# Altium PCB (Poly)TC364_MainBoard_PCB_V1.1.PcbDoc
Units mm, origin at the board's own origin, x right, y up, seen from the top; angles counter-clockwise.
Board outline 88.25 x 67.25 mm, 4 copper layers (TOP, POW02, GND03, BOT), stack 0.603 mm thick; 72 components, 69 nets, 280 pads, 35 vias.
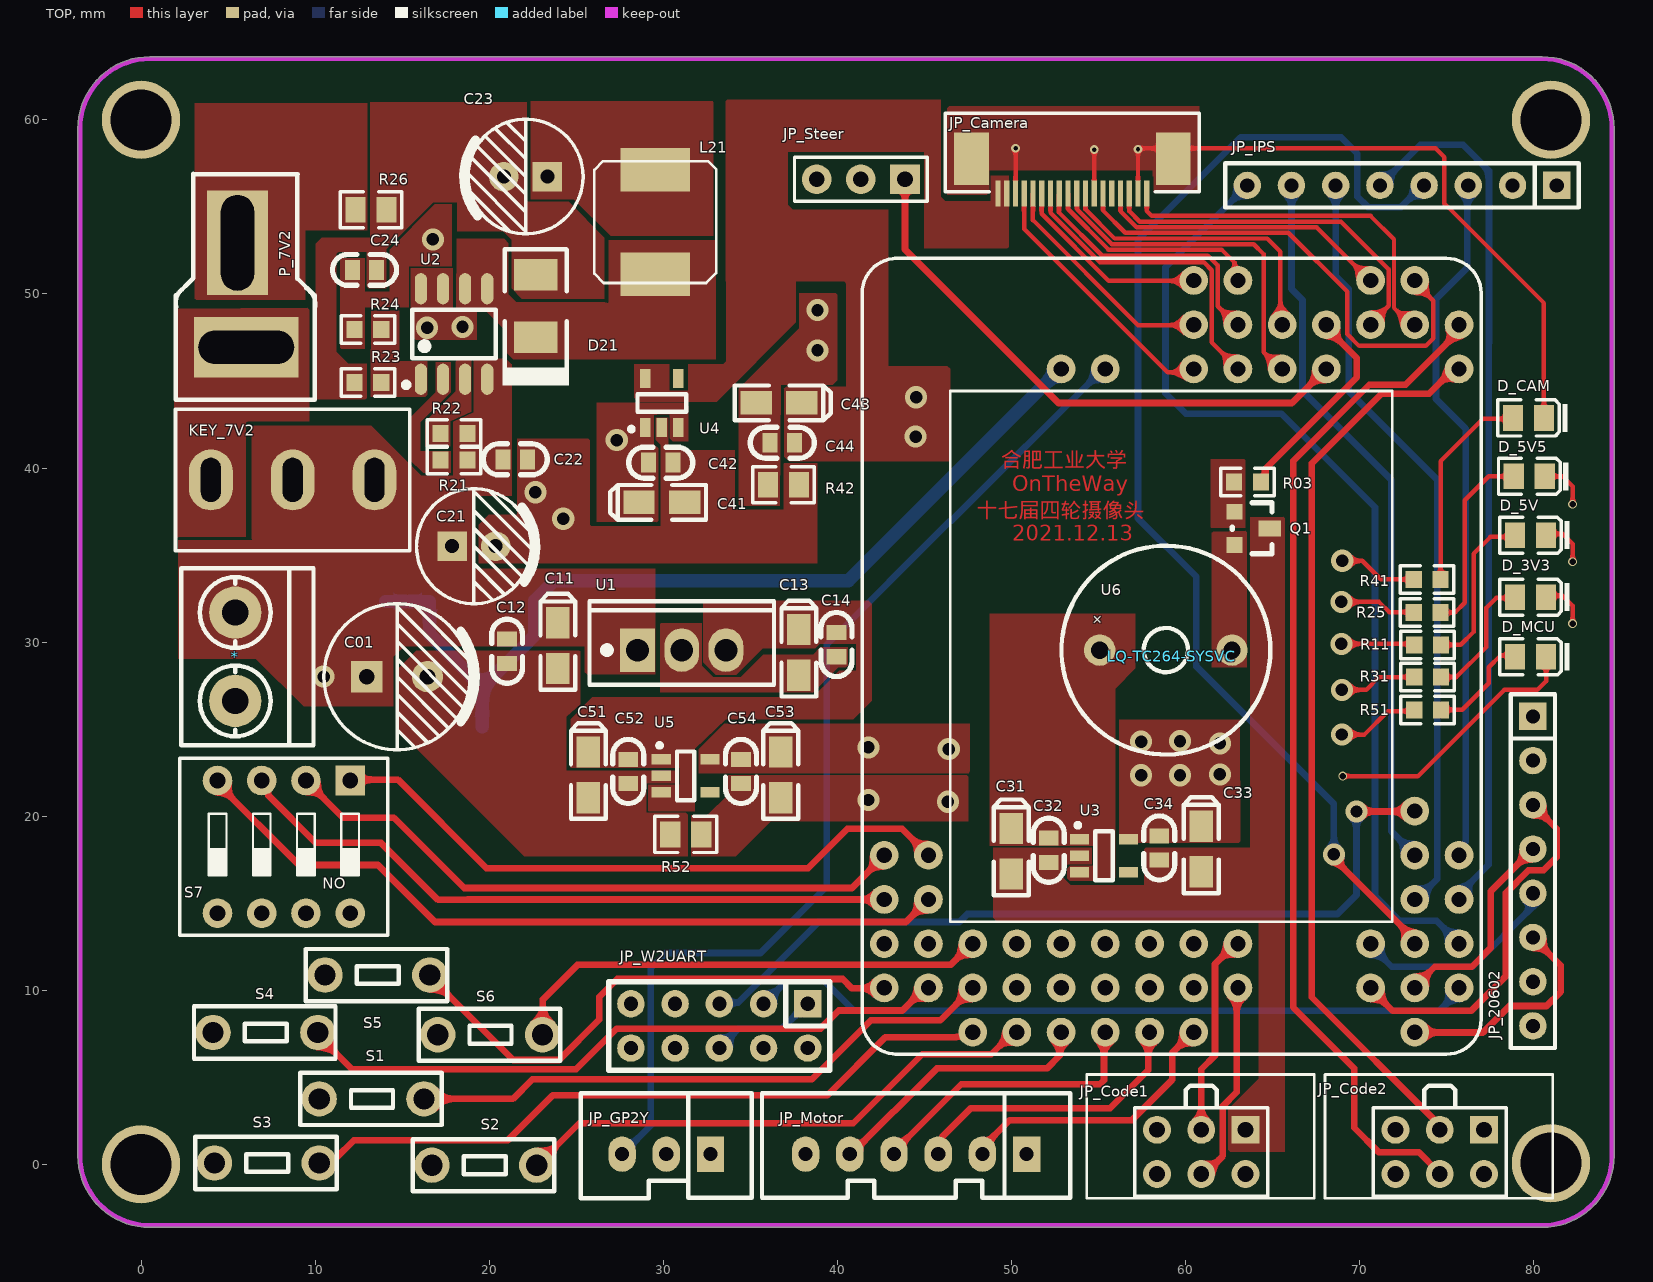
[diagram p0: TOP view]
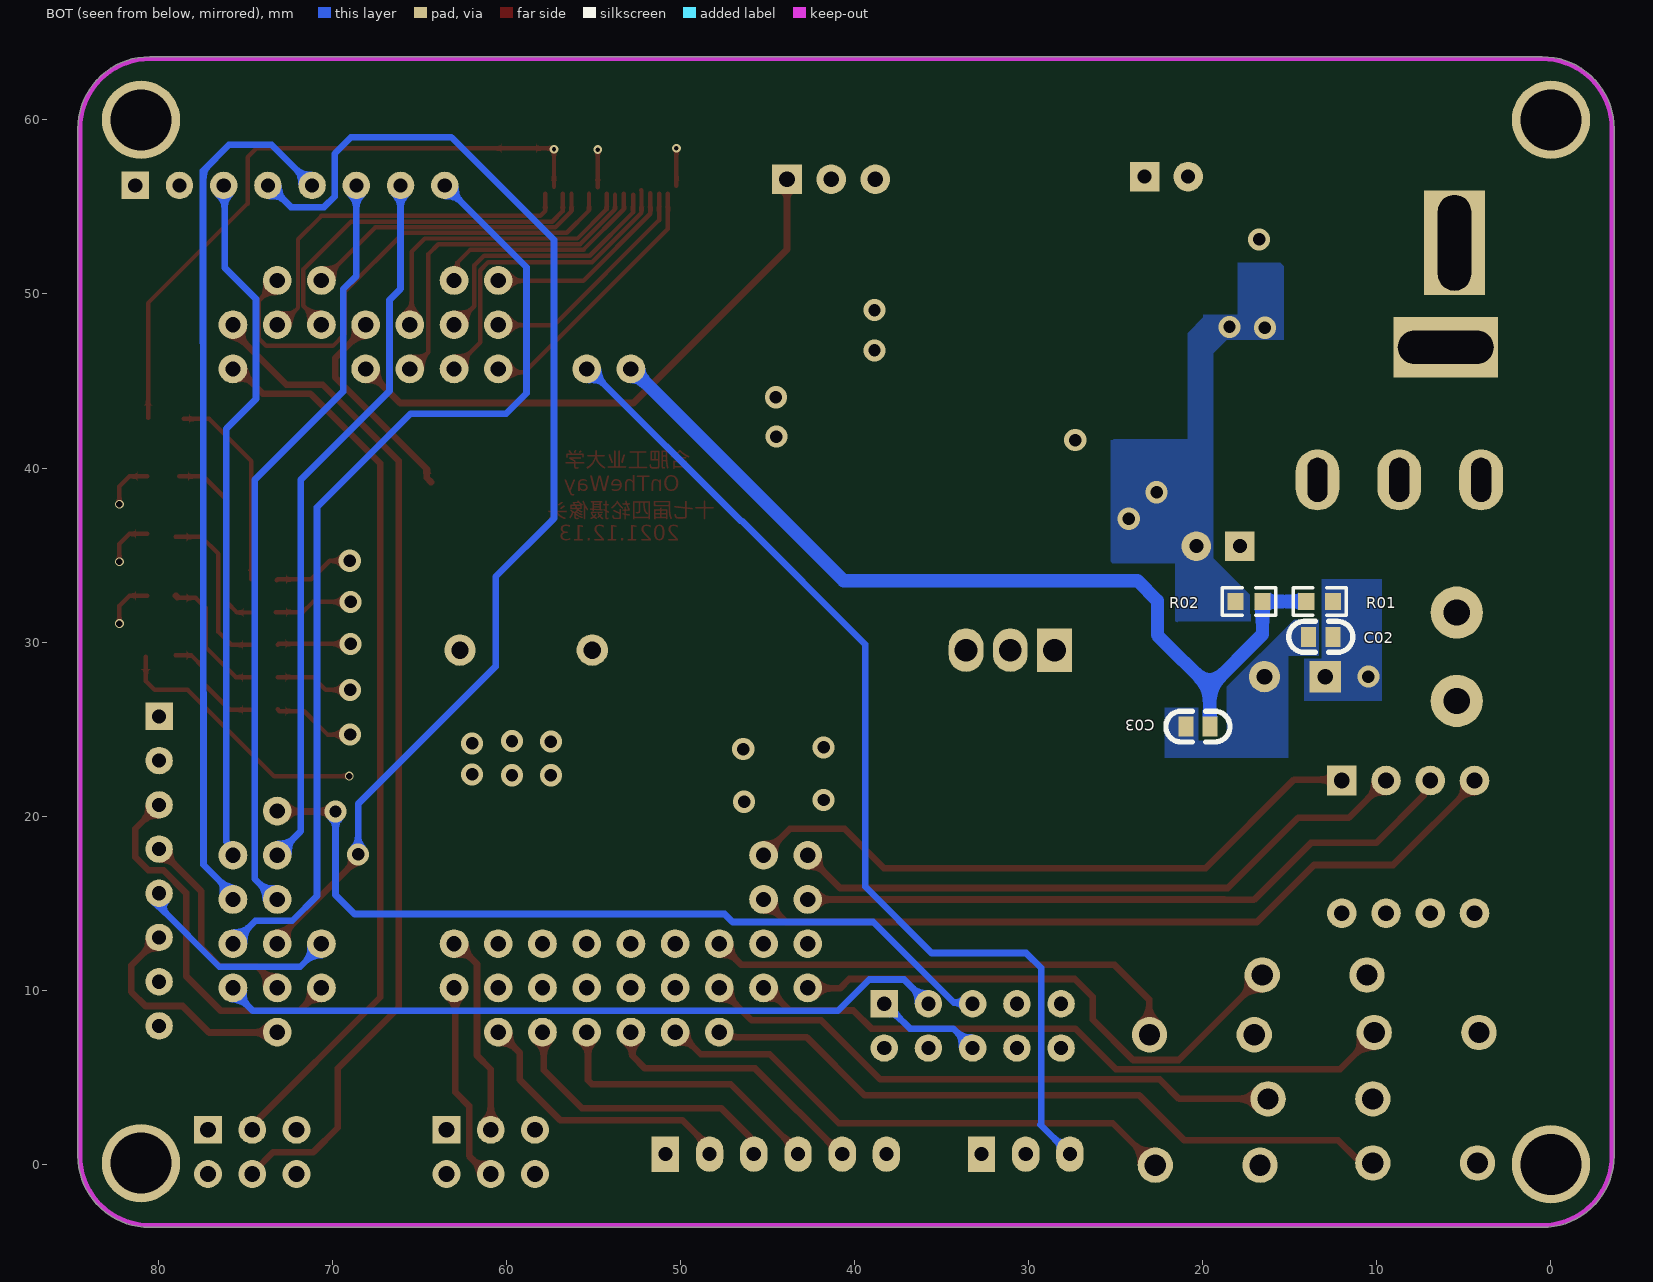
[diagram p1: BOT view, seen from below]
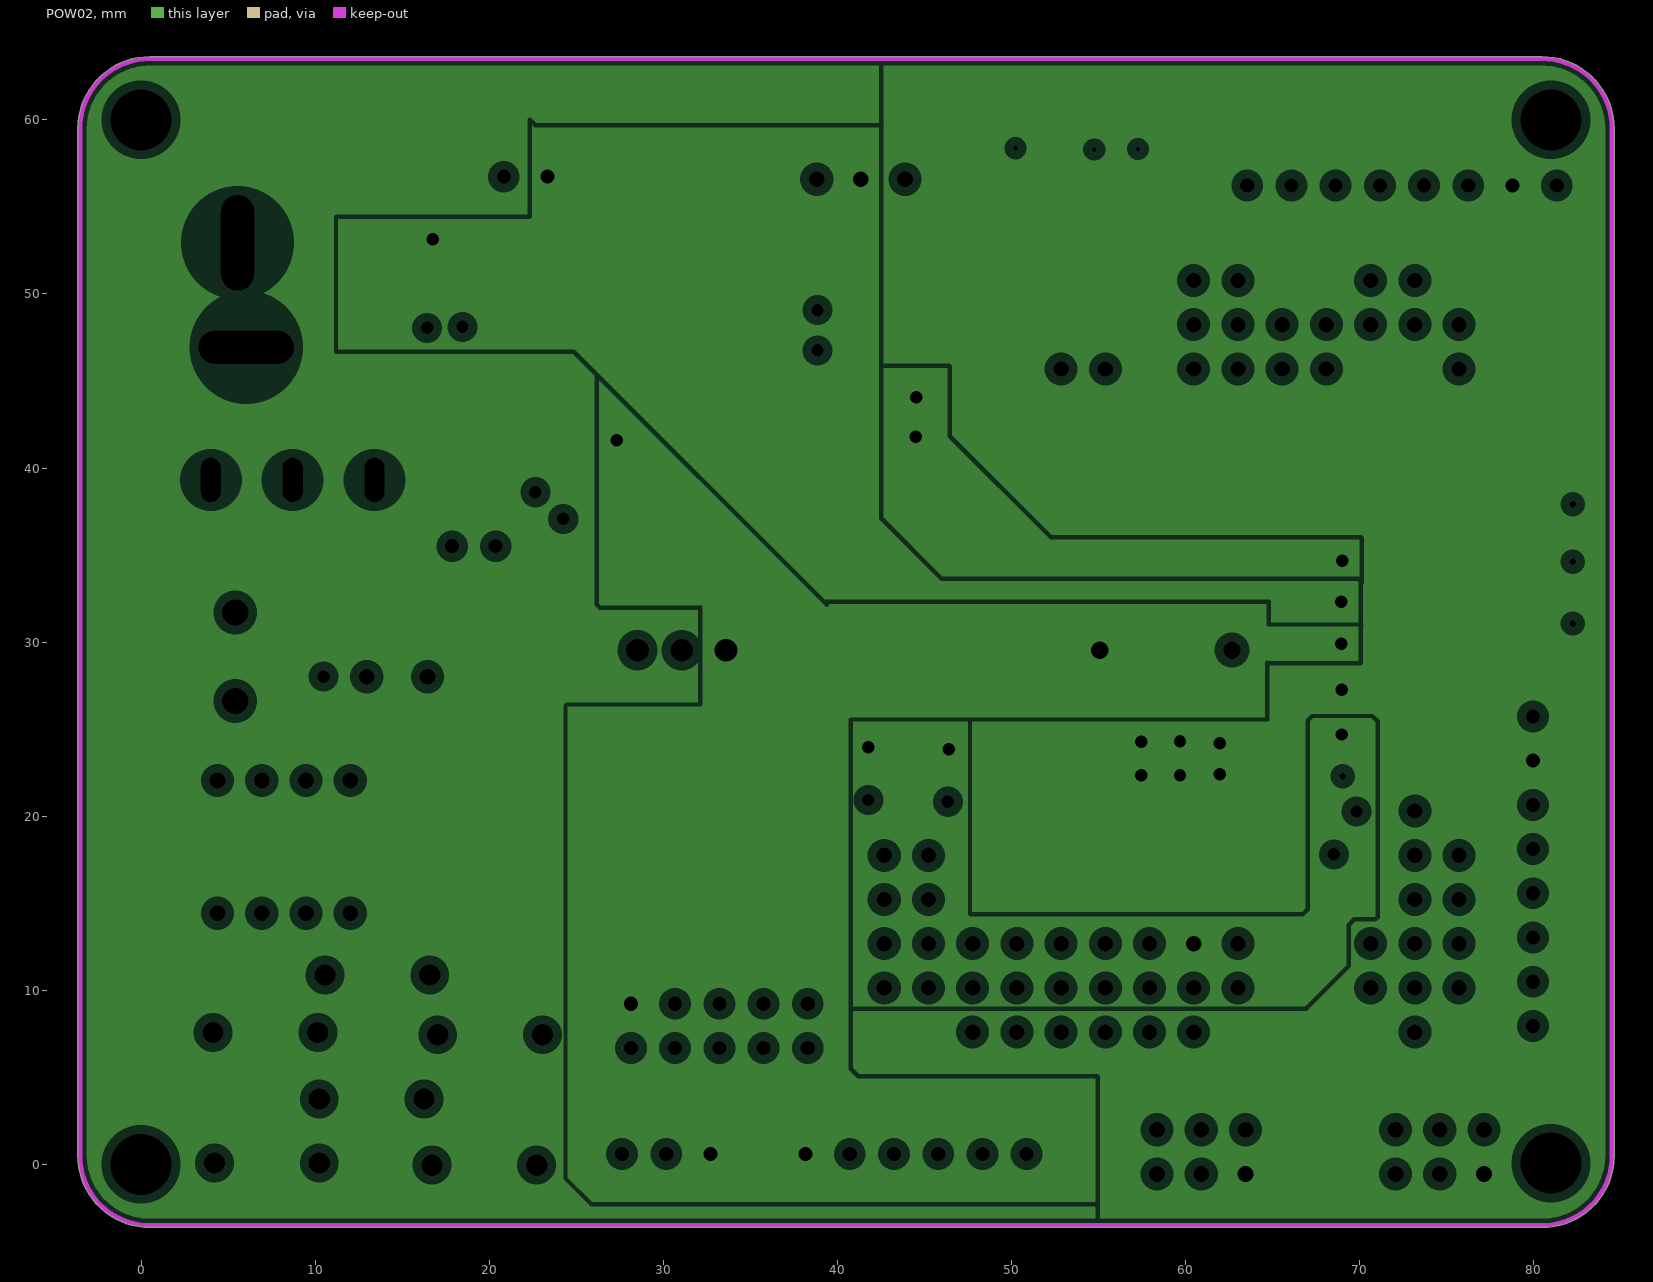
[diagram p2: POW02, clearances drawn from the general rule]
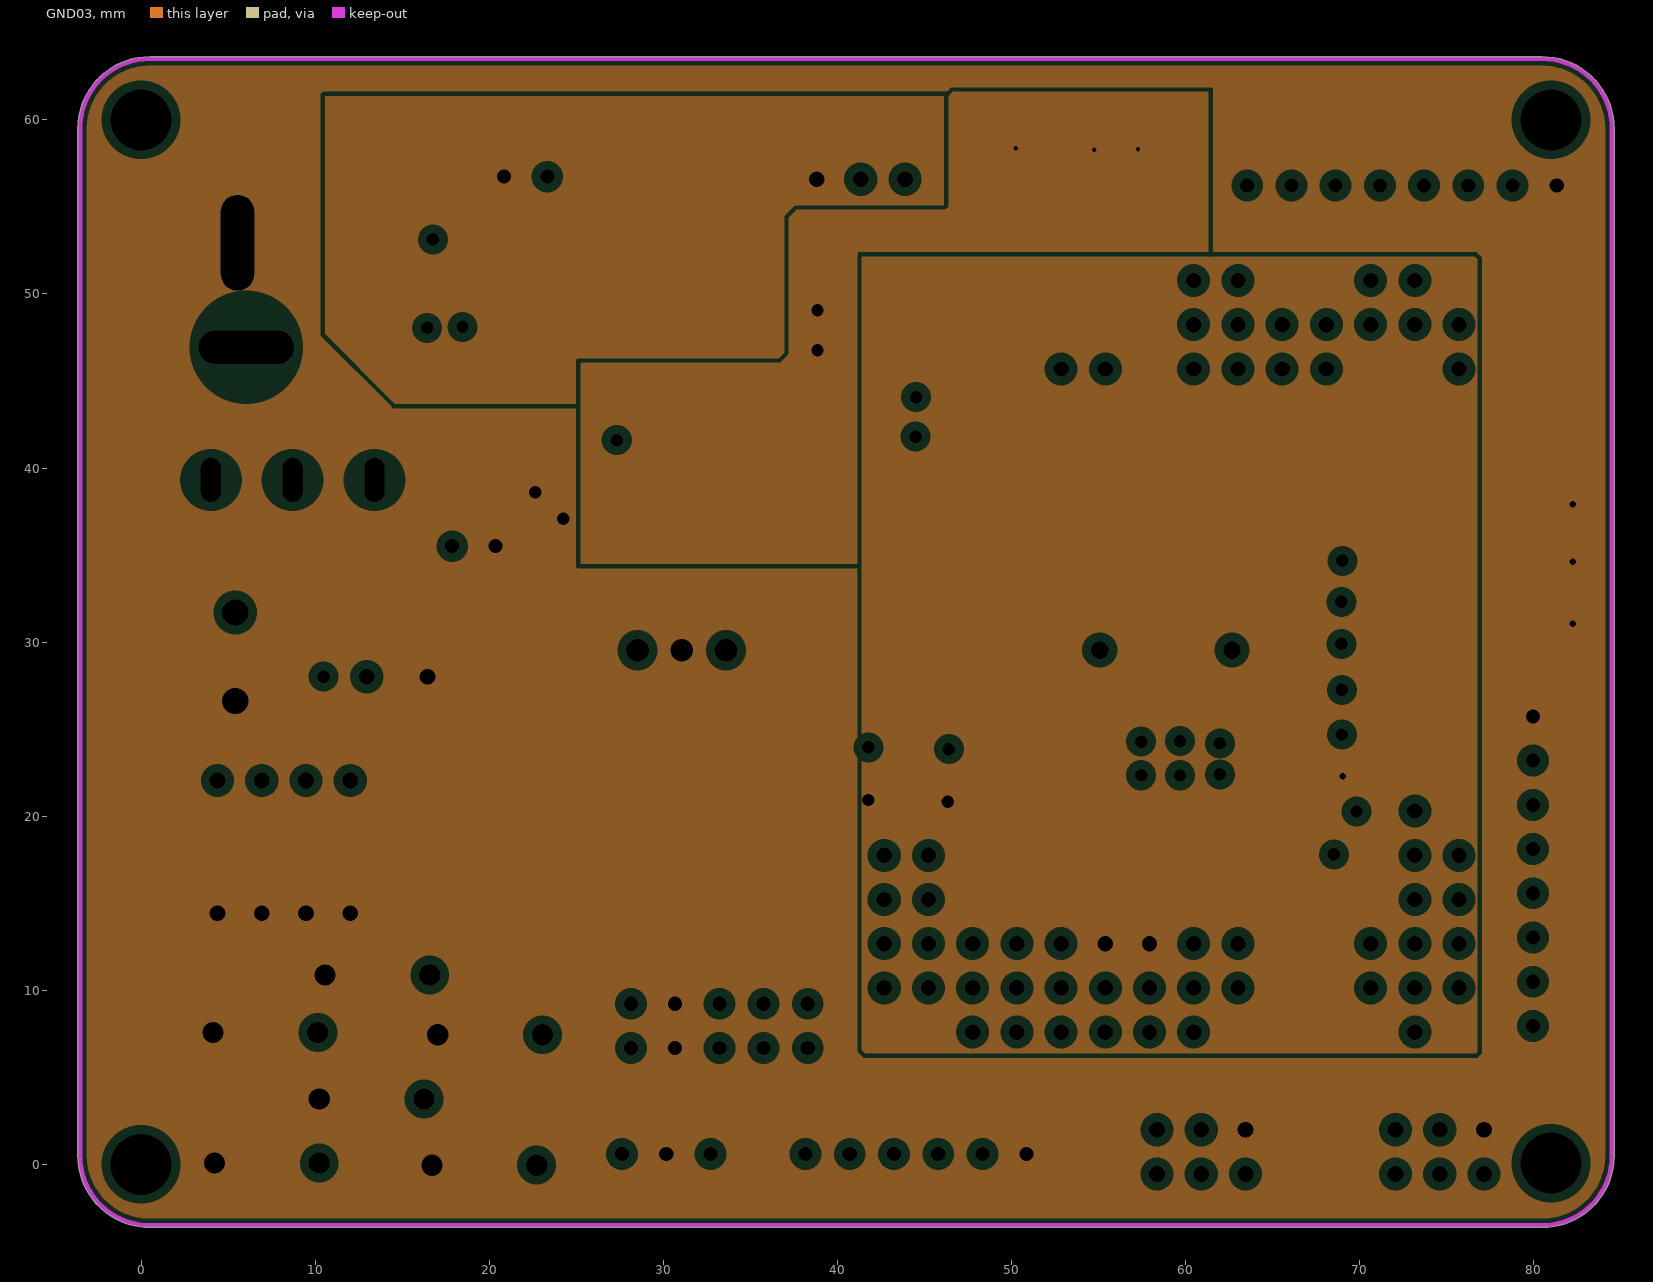
[diagram p3: GND03, clearances drawn from the general rule]

## Layer stack, top to bottom
Top Solder: solder mask 0.0102, Solder Resist, Dk 3.5
TOP: signal copper 0.0356
Dielectric 2: prepreg 0.0711, PP-006, Dk 4.1
POW02: plane copper 0.035, net VCC3V3
Dielectric 1: dielectric 0.32, FR-4, Dk 4.8
GND03: plane copper 0.035, net (Multiple Nets)
Dielectric 3: prepreg 0.0711, PP-006, Dk 4.1
BOT: signal copper 0.0356
Bottom Solder: solder mask 0.0102, Solder Resist, Dk 3.5

## Board outline
-3.627,0.5 -3.627,59.5 cw(c0.5,59.5) 0.5,63.627 80.5,63.627 cw(c80.5,59.5) 84.627,59.501 cw(c80.5,59.5) 84.627,59.5 ccw(c84.5,59.5) 84.627,59.501 84.627,59.5 84.627,0.5 cw(c84.5,0.5) 84.627,0.499 ccw(c80.5,0.5) 84.627,0.5 84.627,0.499 cw(c80.5,0.5) 80.5,-3.627 0.5,-3.627 cw(c0.5,0.5)

## Design rules (kind name [scope] priority, off if disabled: settings)
Clearance [All] p1: gap=0.051 ignorepadtopadclearanceinfootprint=FALSE
HoleSize [All] p1 off: absolutevalues=TRUE maxlimit=2.54 minlimit=0.025 maxpercent=80.000 minpercent=20.000
MinimumSolderMaskSliver [All] p1 off: minsoldermaskwidth=0.254
PlaneClearance [All] p1: clearance=0.508
PlaneConnect [All] p1: planeconnectstyle=Relief reliefexpansion=0.508 reliefentries=4 reliefconductorwidth=0.254 reliefairgap=0.254
PolygonConnect [All] p1: connectstyle=Direct reliefconductorwidth=0.254 reliefentries=4 polygonreliefangle="90 Angle" airgapwidth=0.254
RoutingVias [All] p1: holewidth=0.711 width=1.27 viastyle="Through Hole" minholewidth=0.711 minwidth=1.27 maxholewidth=0.711 maxwidth=1.27
SilkToSilkClearance [All] p1 off: silktosilkclearance=0.254
SilkToSolderMaskClearance [IsPad] p1 off: minsilkscreentomaskgap=0.254 clearancetoexposedcopper=TRUE
SolderMaskExpansion [All] p1: expansion=0.102
Width [All] p1: maxlimit=1.27 minlimit=0.254 preferedwidth=0.381
24 further rules are at their usual default settings.

## Classes and differential pairs
component class TC364_MainBoard_Core_V1.1: LQ-TC264-SYSVC
component class TC364_MainBoard_Singal_V1.0: C03 JP_20602 JP_Camera JP_Code1 JP_Code2 JP_GP2Y JP_IPS JP_Motor JP_Steer JP_W2UART Q1 R01 R02 R03 S1 S2 S3 S4 S5 S6 S7 U6
component class TC364_MainBoard_Power_V1.0: * C01 C02 C11 C12 C13 C14 C21 C22 C23 C24 C31 C32 C33 C34 C41 C42 C43 C44 C51 C52 C53 C54 D21 D_3V3 D_5V D_5V5 D_CAM D_MCU KEY_7V2 L21 P_7V2 R11 R21 R22 R23 R24 R25 R26 R31 R41 R42 R51 R52 U1 U2 U3 U4 U5

## Components (designator, comment, footprint, x,y, rotation, side; value= is the part's Value field where it differs from the comment)
* "KCF301" KF301-2P 5.41,29.159 r0 top
C01 "680uF/16V" "CAP 3.5*8*11.5 - GD" 27.607,31.716 r180 top
C02 "0.1uF" 0603C 12.522,30.302 r0 bottom
C03 "0.1uF" 0603C 19.583,25.146 r0 bottom
C11 "10uF/16V" CASE-A_3216 23.952,29.794 r90 top
C12 "0.1uF" 0603C 21.031,30.175 r270 top
C13 "10uF/16V" CASE-A_3216 37.795,29.413 r90 top
C14 "0.1uF" 0603C 39.954,30.556 r270 top
C21 "330uF/16V" "CAP 2.5*6.3*11.2 - BK" 19.126,35.509 r0 top
C22 "0.1uF" 0603C 20.8,40.5 r0 top
C23 "330uF/16V" "CAP 2.5*6.3*11.2 - BK" 22.093,56.744 r180 top
C24 "0.1uF" 0603C 12.141,51.384 r0 top
C31 "10uF/16V" CASE-A_3216 49.987,17.983 r90 top
C32 "0.1uF" 0603C 52.146,18.745 r270 top
C33 "10uF/16V" CASE-A_3216 60.909,18.11 r90 top
C34 "0.1uF" 0603C 58.496,18.872 r270 top
C41 "10uF/16V" CASE-A_3216 29.921,38.024 r180 top
C42 "0.1uF" 0603C 29.159,40.31 r0 top
C43 "10uF/16V" CASE-A_3216 36.652,43.739 r0 top
C44 "0.1uF" 0603C 37.541,41.453 r180 top
C51 "10uF/16V" CASE-A_3216 25.705,22.377 r90 top
C52 "0.1uF" 0603C 27.991,23.266 r270 top
C53 "10uF/16V" CASE-A_3216 36.754,22.377 r90 top
C54 "0.1uF" 0603C 34.468,23.266 r270 top
D21 "SS54" SMA 22.682,51.105 r270 top
D_3V3 "LED" 0805_LED_S1 79.832,32.588 r180 top
D_5V "LED" 0805_LED_S1 79.832,36.144 r180 top
D_5V5 "LED" 0805_LED_S1 79.756,39.522 r180 top
D_CAM "LED" 0805_LED_S1 79.705,42.875 r180 top
D_MCU "LED" 0805_LED_S1 79.832,29.159 r180 top
JP_20602 "HDR-1X7" SIP8 79.959,25.73 r270 top
JP_Camera "FPC05-18" Camera-Port 53.162,58.496 r0 top
JP_Code1 "Header3X2" HDR2.54-LI-2x3P 60.909,0.711 r180 top
JP_Code2 "Header3X2" HDR2.54-LI-2x3P 74.609,0.711 r180 top
JP_GP2Y "HDR-1X3" SIP3N 32.715,0.584 r180 top
JP_IPS "HDR-1X7" SIP8 81.331,56.236 r180 top
JP_Motor "HDR-1X6" SIP6N 50.876,0.584 r180 top
JP_Steer "HDR-1X3" HDR2.54-LI-3P 41.351,56.591 r180 top
JP_W2UART "HEADER 5X2" IDC10-JLC 38.303,9.22 r180 top
KEY_7V2 "SS-12F23" KEY_7V2 8.712,39.319 r0 top
L21 "33uH" "7*7 L" 29.54,51.13 r90 top
LQ-TC264-SYSVC "LQ-TC264-SYSVC" TC364 42.697,48.235 r0 top
P_7V2 "T_Type_Adapter" T_Type_Adapter 5.596,51.695 r270 top
Q1 "PNP8550" PNP8550-SO 62.814,37.49 r270 top
R01 "200K" 0603_R 13.284,32.334 r180 bottom
R02 "100K" 0603_R 17.348,32.334 r180 bottom
R03 "1K" 0603_R 63.568,39.192 r180 top
R11 "4.7K" 0603_R 73.914,29.845 r0 top
R21 "1K" 0603_R 17.983,40.462 r0 top
R22 "2.7K" 0603_R 17.983,41.986 r0 top
R23 "3.9K" 0603_R 13.03,44.907 r180 top
R24 "22K" 0603_R 13.03,47.955 r0 top
R25 "4.7K" 0603_R 73.889,31.699 r0 top
R26 "0" 0805_R 15.238,52.805 r0 top
R31 "4.7K" 0603_R 73.914,27.991 r0 top
R41 "4.7K" 0603_R 73.889,33.604 r0 top
R42 "0" 0805_R 34.874,41.074 r180 top
R51 "4.7K" 0603_R 73.914,26.111 r0 top
R52 "0" 0805_R 33.325,16.914 r0 top
S1 "SW-PB" KEY2-6X3 16.252,3.759 r180 top
S2 "SW-PB" KEY2-6X3 22.729,-0.051 r180 top
S3 "SW-PB" KEY2-6X3 10.236,0.076 r180 top
S4 "SW-PB" KEY2-6X3 10.156,7.569 r180 top
S5 "SW-PB" KEY2-6X3 16.586,10.871 r180 top
S6 "SW-PB" KEY2-6X3 23.063,7.442 r180 top
S7 "SW-4P" "CSW DIP-4P" 8.204,18.237 r180 top
U1 "SPX2940-5.0V" TO-220(TO-220-3) 31.064,29.54 r0 top
U2 "AS1015" SOP-8_150mil 17.983,47.701 r0 top
U3 "RT9013-3.3" SOT-23-5 55.321,17.729 r180 top
U4 "RT9013-3.3" SOT-23-5 29.921,43.739 r270 top
U5 "RT9013-3.3" SOT-23-5 31.29,22.316 r180 top
U6 "BEEP" BUZ 58.877,29.54 r0 top

## Footprints (in the part's own frame and the unit in brackets; to place one, negate y for a bottom-side part, rotate by r counter-clockwise, add the part's x,y. Pads: shape width x height; smd on the part's side, far side on the other; paste and mask are expansions set on the pad)
"7*7 L" [mm]
  rect 2.5x4 smd: 1(0,0) 2(6,0)
  silkscreen extent -0.5,-3.5 6.5,3.5
0603_R [mm]
  rect 0.93x0.98 smd: 1(-0.77,0) 2(0.77,0)
  silkscreen extent -1.53,-0.79 1.54,0.79, body extent -0.85,-0.4 0.85,0.4, height 0.56
0603C [mil]
  rect 34x45 smd: 1(0,0) 2(55,0)
  silkscreen extent -45,-35 100,35, body extent -3,-18 59,16, height 37
0805_LED_S1 [mm]
  rect 1.16x1.47 smd: A(0.89,0) K(-0.89,0)
  silkscreen extent -2.25,-1.04 1.77,1.03, body extent -1.01,-0.62 1.01,0.62, height 1.1
0805_R [mm]
  rect 1.16x1.47 smd: 1(-1.141,2.034) 2(-2.921,2.034)
  silkscreen extent -3.8,1 -0.26,3.07, body extent -3.03,1.41 -1.03,2.66, height 0.49
BUZ [mm]
  round 1.8 hole 1: 1(-3.8,0) 2(3.8,0)
  silkscreen extent -6,-6 6,6
Camera-Port [mil]
  rect 78.74x118.11 smd: 0(-214.92,-28.76) 0(241.68,-28.76)
  rect 12x59.06 smd: 1(181.68,-107.5) 2(161.88,-107.5) 3(142.08,-107.5) 4(122.28,-107.5) 5(102.48,-107.5) 6(82.68,-107.5) 7(62.88,-107.5) 8(43.08,-107.5) 9(23.28,-107.5) 10(3.48,-107.5) 11(-16.32,-107.5) 12(-36.12,-107.5) 13(-55.92,-107.5) 14(-75.72,-107.5) 15(-95.52,-107.5) 16(-115.32,-107.5) 17(-135.12,-107.5) 18(-154.92,-107.5)
  silkscreen extent -274,-103 301,75, body extent -271,-111 297,90, height 79
"CAP 2.5*6.3*11.2 - BK" [mm] "脚距2.5mm直径6.3mm高度11.2mm             淘宝ID:黄晶宝石"
  rect 1.7x1.7 hole 0.8: 1(-1.25,0)
  round 1.7 hole 0.8: 2(1.25,0)
  silkscreen extent -3.3,-3.3 3.56,3.3, body extent -3.15,-3.15 3.16,3.15, height 11.24
"CAP 3.5*8*11.5 - GD" [mm]
  rect 1.8x1.8 hole 0.9: 1(14.648,3.7)
  round 1.8 hole 0.9: 2(11.148,3.7)
  silkscreen extent 8.4,-0.5 17.1,7.9, body extent 8.89,-0.3 16.9,7.7, height 11.54
CASE-A_3216 [mm]
  rect 1.8x1.35 smd: 1(1.31,0) 2(-1.31,0)
  silkscreen extent -2.54,-1 2.97,1, body extent -1.7,-0.84 1.7,0.84, height 1.71
"CSW DIP-4P" [mm] "11.7*9.9*7mm"
  rect 1.7x1.7 hole 0.9: 1(-3.81,-3.81)
  round 1.7 hole 0.9: 2(-1.27,-3.81) 3(1.27,-3.81) 4(3.81,-3.81) 5(3.81,3.81) 6(1.27,3.81) 7(-1.27,3.81) 8(-3.81,3.81)
  silkscreen extent -5.97,-5.08 5.97,5.08, body extent -5.86,-4.95 5.86,4.95, height 6.65
HDR2.54-LI-2x3P [mm] "封装库来自淘宝卖家 ID：黄晶宝石"
  rect 1.6x1.6 hole 0.9: 1(-2.54,-1.27)
  round 1.6 hole 0.9: 2(-2.54,1.27) 3(0,-1.27) 4(0,1.27) 5(2.54,-1.27) 6(2.54,1.27)
  silkscreen extent -3.81,-2.54 3.81,2.54, body extent -3.81,-2.54 3.81,2.54, height 8.5
HDR2.54-LI-3P [mm] "排针，3脚"
  rect 1.7x1.7 hole 0.9: 1(-2.54,0)
  round 1.7 hole 0.9: 2(0,0) 3(2.54,0)
  silkscreen extent -3.81,-1.27 3.81,1.27, body extent -3.81,-1.27 3.81,1.27, height 8.5
IDC10-JLC [mil]
  rect 62x62 hole 32: 1(0,0)
  round 62 hole 32: 2(0,100) 3(100,0) 4(100,100) 5(200,0) 6(200,100) 7(300,0) 8(300,100) 9(400,0) 10(400,100)
  silkscreen extent -50,-50 450,150, body extent -53,-45 447,155, height 315
KEY2-6X3 [mil]
  round 80 hole 48: 1(0,0) 2(236.85,0)
  silkscreen extent -40,-59 280,59, body extent -37,-68 271,70, height 170
KEY_7V2 [mil]
  oval 99x138 hole 45 slot 100 at 90 deg: 1(-185.04,0) 2(0,0) 3(185.04,0)
  silkscreen extent -265,-160 265,160
KF301-2P [mm]
  round 3 hole 1.5: 1(0,-2.54) 2(0,2.54)
  silkscreen extent -3.1,-5.08 4.5,5.08
PNP8550-SO [mil]
  rect 36x36 smd: 1(0,0) 2(75,0)
  rect 36x50 smd: 3(38,80)
  silkscreen extent -20,-5 95,85, body extent -21,-8 97,90, height 42
SIP3N [mil]
  rect 62x80 hole 32: 1(0,0)
  oval 62x80 hole 32: 2(100,0) 3(200,0)
  silkscreen extent -93,-138 293,100, body extent -99,-128 297,96, height 277
SIP6N [mil]
  rect 62x80 hole 32: 1(0,0)
  oval 62x80 hole 32: 2(100,0) 3(200,0) 4(300,0) 5(400,0) 6(500,0)
  silkscreen extent -98,-138 598,98, body extent -99,-129 597,95, height 277
SIP8 [mil]
  rect 62x62 hole 32: 1(0,0)
  round 62 hole 32: 2(100,0) 3(200,0) 4(300,0) 5(400,0) 6(500,0) 7(600,0) 8(700,0)
  silkscreen extent -50,-50 750,50, body extent -50,-50 750,50, height 335
SMA [mm]
  rect 1.8x2.5 smd: 1(0,0) 2(3.6,0)
  silkscreen extent -1.47,-1.9 6.35,1.91
SOP-8_150mil [mm]
  oval 0.7x1.8 smd: 1(-1.905,-2.6) 2(-0.635,-2.6) 3(0.635,-2.6) 4(1.905,-2.6) 5(1.905,2.6) 6(0.635,2.6) 7(-0.635,2.6) 8(-1.905,2.6)
  silkscreen extent -2.9,-3.07 2.4,1.4, body extent -2.5,-3.1 2.5,3.1, height 1.75
SOT-23-5 [mm]
  rect 1.1x0.6 smd: 1(1.4,-0.95) 2(1.4,0) 3(1.4,0.95) 4(-1.4,0.95) 5(-1.4,-0.95)
  silkscreen extent -0.5,-1.87 1.62,1.4
T_Type_Adapter [mm]
  rect 6x3.5 hole 1.905 slot 5.49 at 0 deg: 1(-1.245,-0.051)
  rect 3.5x6 hole 1.905 slot 5.49 at 90 deg: 2(4.755,0.449)
  silkscreen extent -5.21,-3.61 7.77,4.42
TC364 [mm]
  round 1.65 hole 0.88: 21(0,-30.48) 22(2.54,-30.48) 23(0,-33.02) 24(2.54,-33.02) 25(0,-35.56) 26(2.54,-35.56) 27(0,-38.1) 28(2.54,-38.1) 30(5.08,-38.1) 31(5.08,-35.56) 33(7.62,-38.1) 34(7.62,-35.56) 36(10.16,-38.1) 37(10.16,-35.56) 39(12.7,-38.1) 40(12.7,-35.56) 42(15.24,-38.1) 43(15.24,-35.56) 45(17.78,-38.1) 46(17.78,-35.56) 48(20.32,-38.1) 49(20.32,-35.56) 57(27.94,-38.1) 58(27.94,-35.56) 60(30.48,-38.1) 61(30.48,-35.56) 62(33.02,-38.1) 63(33.02,-35.56) 64(33.02,-33.02) 65(30.48,-33.02) 66(33.02,-30.48) 67(30.48,-30.48) 69(30.48,-27.94) 88(33.02,-2.54) 89(33.02,0) 91(30.48,0) 94(27.94,0) 96(25.4,-2.54) 97(25.4,0) 99(22.86,-2.54) 100(22.86,0) 102(20.32,-2.54) 103(20.32,0) 105(17.78,-2.54) 106(17.78,0) 111(12.7,-2.54) 114(10.16,-2.54)
  round 1.65 hole 0.88 mask+0.102: 29(5.08,-40.64) 32(7.62,-40.64) 35(10.16,-40.64) 38(12.7,-40.64) 41(15.24,-40.64) 44(17.78,-40.64) 59(30.48,-40.64) 92(30.48,2.54) 95(27.94,2.54) 104(20.32,2.54) 107(17.78,2.54)
  silkscreen extent -1.27,-41.91 34.29,3.81
TO-220(TO-220-3) [mm]
  rect 2x2.5 hole 1.3: 1(-2.54,0)
  oval 2x2.5 hole 1.3: 2(0,0) 3(2.54,0)
  silkscreen extent -5.3,-2 5.3,2.8, body extent -5.08,-1.45 5.08,2.9, height 19.6

## Part data
C01 C11 C13 C21 C23 C31 C33 C41 C43 C51 C53: library part "Cap Pol1", "Polarized Capacitor (Radial)", LatestRevisionDate=17-Jul-2002, LatestRevisionNote="Re-released for DXP Platform.", PackageDescription="Polarized Capacitor (Radial); 2 Leads", PackageReference=RB7.6-15, Published=8-Jun-2000, Publisher="Altium Limited"
C02 C03 C12 C14 C22 C24 C32 C34 C42 C44 C52 C54: library part CAP, "Capacitor"
D21: library part SS34, "肖特基二极管", 属性=40V
D_3V3 D_5V D_5V5 D_CAM D_MCU: "发光二极管"
JP_20602 JP_IPS: library part "HEADER 8", "8 Pin Header"
JP_Code1 JP_Code2: library part "Header 3X2", "3*2P接插件"
JP_GP2Y JP_Steer: library part "Header 3", "3P接插件", BOM名称=3, 学习资源=https://shop463601444.t
JP_Motor: library part "HEADER 6"
KEY_7V2: library part SSW-1P, "1路波动开关", 学习资源=www.o
L21: library part L-CDRH, "功率屏蔽电感", 联系售后=https://shop463601444.t
Q1: library part PNP, "PNP Transistor"
R01 R02 R03 R11 R25 R26 R31 R41 R42 R51 R52: library part RES
R21 R22 R23 R24: library part RES, "贴片电阻", 学习资源=www.o
S1 S2 S3 S4 S5 S6: "按键"
S7: "4路编码开关", BOM名称=4, 学习资源=https://shop463601444.t, 淘宝ID=封
U1: library part LM2940, "5V稳压芯片", BOM名称=5V, 联系售后=www.o
U2: "可调升压芯片"
U6: library part BELL, "Bell"

## Free pads (board coordinates)
  round 4.5 hole 3.5: 2(0,0) 2(0,60) 2(81,0.068) 2(81,60)

## Via types
v1: diameter 1.27, hole 0.711, TOP to BOT, 28 vias
v2: diameter 0.508, hole 0.381, TOP to BOT, 4 vias
v3: diameter 0.508, hole 0.254, TOP to BOT, 3 vias

## Nets (pads, with @x,y where several pads share a name; then routed paths per layer and width w, separated by ;. In a path a pad name is that pad's centre, name@x,y a point inside that pad or via, vN(x,y) a via of type N, cw(c..) or ccw(c..) an arc to the next point about the centre after c; other vN are vias at no path point)
AN44: C03.1 LQ-TC264-SYSVC.114 R01.1 R02.2 | length 52.9
  BOT w0.762: R01.1 R02.2 16.578,30.437 19.609,27.407 ; C03.1@19.609,25.121 19.609,27.407 ; LQ-TC264-SYSVC.114@52.781,45.669 40.64,33.528 23.749,33.528 22.606,32.385 22.606,30.404 19.609,27.407
AN47: JP_GP2Y.3 LQ-TC264-SYSVC.111 | length 59.8
  BOT w0.381: JP_GP2Y.3 29.324,2.273 ; 29.286,2.311 29.286,11.278 30.15,12.141 35.585,12.141 39.395,15.951 39.395,29.87 46.507,36.982 46.558,36.982 55.169,45.593 LQ-TC264-SYSVC.111@55.372,45.593
GND: *.1 C01.2 C02.2 C03.2 C11.2 C12.2 C13.2 C14.2 C21.2 C22.2 C31.2 C32.2 C33.2 C34.2 C41.2 C42.2 C51.2 C52.2 D_3V3.K D_5V5.K D_5V.K JP_20602.1 JP_Code1.1 JP_Code2.1 JP_GP2Y.2 JP_IPS.1 JP_Motor.1 JP_W2UART.7 JP_W2UART.8 P_7V2.1 Q1.3 R02.1 R26.2 R42.2 R52.2 S1.2 S2.2 S3.2 S4.2 S5.2 S6.2 S7.5 S7.6 S7.7 S7.8 U1.2 U2.7 U2.8 U3.2 U4.2 U5.2 | length 8.6
  TOP w0.254: D_3V3.K@80.646,32.664 81.661,32.664 82.245,32.08 v2(82.245,31.064) ; D_5V.K@80.646,36.22 81.661,36.22 82.245,35.636 v2(82.245,34.62) ; D_5V5.K 81.661,39.522 82.245,38.938 v2(82.245,37.922)
  other v1: 24.257,37.084 22.657,38.608 16.434,48.057 18.466,48.108
GNDCAM: C43.2 C44.2 D_CAM.K JP_Camera.0 JP_Camera.2 JP_Camera.7 JP_Camera.16 R42.1 | length 41.7
  TOP w0.254: JP_Camera.16@50.241,56.21 v3(50.241,58.369) ; JP_Camera.7@54.762,56.134 v3(54.762,58.293) ; v3@57.226,58.369 57.228,58.367 57.505,58.367 57.507,58.369 74.371,58.369 74.879,57.861 74.879,55.194 80.595,49.478 D_CAM.K ; JP_Camera.2@57.277,56.159 v3(57.277,58.318)
  other v1: 38.862,46.761 38.862,49.073
GNDMCU: C53.2 C54.2 D_MCU.K LQ-TC264-SYSVC.40 LQ-TC264-SYSVC.43 R52.1 | length 15.3
  TOP w0.254: v2(69.037,22.301) 73.355,22.301 78.308,27.254 80.213,27.254 80.722,27.763 D_MCU.K
  other v1: 46.355,20.828 41.783,20.93
GNDSteer: C23.2 C24.2 D21.1 JP_Steer.3 R23.2 R26.1
NetD21_2: D21.2 L21.1 U2.5 U2.6
NetD_3V3_A: D_3V3.A R31.2 | length 7.6
  TOP w0.254: R31.2 75.565,27.991 77.292,29.718 77.292,31.979 77.851,32.537 78.867,32.537 D_3V3.A@78.918,32.588
  TOP w0.381: D_3V3.A@78.918,32.588 D_3V3.A@78.994,32.664
NetD_5V5_A: D_5V5.A R25.2 | length 10.8
  TOP w0.254: R25.2 75.489,31.699 76.048,32.258 76.048,38.151 77.419,39.522 D_5V5.A@78.816,39.522
NetD_5V_A: D_5V.A R11.2 | length 9.5
  TOP w0.254: R11.2 75.819,29.845 76.556,30.582 76.556,35.077 77.521,36.043 D_5V.A@79.019,36.043
NetD_CAM_A: D_CAM.A R41.2 | length 11.7
  TOP w0.254: R41.2 74.659,40.394 77.089,42.824 D_CAM.A@78.537,42.824
NetD_MCU_A: D_MCU.A R51.2 | length 6.2
  TOP w0.254: R51.2 75.895,26.111 77.419,27.635 77.419,28.55 78.105,29.235 D_MCU.A@79.019,29.235
NetKEY_7V2_1: KEY_7V2.1 P_7V2.2
NetQ1_1: Q1.1 R03.2
NetQ1_2: Q1.2 U6.2
NetR21_1: R21.1 U2.2
NetR22_1: R22.1 U2.3
NetR23_1: R23.1 R24.2 U2.1
P00.0: JP_Camera.8 LQ-TC264-SYSVC.100 | length 17.4
  TOP w0.254: JP_Camera.8 54.256,54.862 55.931,53.188 64.694,53.188 65.456,52.426 LQ-TC264-SYSVC.100@65.456,48.184
P00.1: JP_Camera.9 LQ-TC264-SYSVC.99 | length 19.7
  TOP w0.254: JP_Camera.9@53.772,55.702 53.772,54.864 55.778,52.857 63.932,52.857 64.491,52.299 64.491,46.66 LQ-TC264-SYSVC.99@65.481,45.669
P00.2: JP_Camera.10 LQ-TC264-SYSVC.104 | length 12.8
  TOP w0.254: JP_Camera.10@53.264,55.753 53.264,54.864 55.575,52.553 62.078,52.553 62.824,51.806 62.824,50.867 LQ-TC264-SYSVC.104@62.941,50.749
P00.3: JP_Camera.11 LQ-TC264-SYSVC.103 | length 15.3
  TOP w0.254: JP_Camera.11@52.73,55.702 52.73,54.686 55.22,52.197 61.29,52.197 61.849,51.638 61.849,49.301 LQ-TC264-SYSVC.103@62.941,48.209
P00.4: JP_Camera.12 LQ-TC264-SYSVC.102 | length 18.2
  TOP w0.254: JP_Camera.12@52.273,55.956 52.248,55.931 52.248,54.661 55.093,51.816 61.062,51.816 61.519,51.359 61.519,47.219 62.941,45.796 LQ-TC264-SYSVC.102@62.941,45.669
P00.5: JP_Camera.13 LQ-TC264-SYSVC.107 | length 11.4
  TOP w0.254: JP_Camera.13@51.74,55.778 51.74,54.61 55.601,50.749 LQ-TC264-SYSVC.107@60.401,50.749
P00.6: JP_Camera.14 LQ-TC264-SYSVC.106 | length 13.3
  TOP w0.254: JP_Camera.14 51.239,54.247 57.277,48.209 60.401,48.209 LQ-TC264-SYSVC.106@60.503,48.209
P00.7: JP_Camera.15 LQ-TC264-SYSVC.105 | length 15.2
  TOP w0.254: JP_Camera.15 50.736,53.734 58.979,45.491 60.223,45.491 LQ-TC264-SYSVC.105@60.427,45.695
P02.0: JP_Camera.6 LQ-TC264-SYSVC.92 | length 28.6
  TOP w0.254: JP_Camera.6 55.262,54.796 56.54,53.518 65.913,53.518 69.291,50.14 69.291,47.701 69.977,47.015 73.812,47.015 74.244,47.447 74.244,49.606 LQ-TC264-SYSVC.92@73.101,50.749
P02.1: JP_Camera.1 LQ-TC264-SYSVC.91 | length 21.3
  TOP w0.254: JP_Camera.1 57.777,54.771 58.064,54.483 70.637,54.483 71.984,53.137 71.984,49.2 72.974,48.209 LQ-TC264-SYSVC.91@73.101,48.209
P02.2: JP_Camera.4 LQ-TC264-SYSVC.95 | length 17
  TOP w0.254: JP_Camera.4 56.268,54.755 57.201,53.823 67.539,53.823 70.561,50.8 LQ-TC264-SYSVC.95@70.561,50.749
P02.3: JP_Camera.3 LQ-TC264-SYSVC.94 | length 21
  TOP w0.254: JP_Camera.3 56.771,54.76 57.379,54.153 68.936,54.153 71.679,51.41 71.679,49.327 LQ-TC264-SYSVC.94@70.561,48.209
P02.6: LQ-TC264-SYSVC.97 R03.1 | length 11.8
  TOP w0.381: R03.1 64.585,39.439 64.585,39.947 69.85,45.212 69.85,46.304 LQ-TC264-SYSVC.97@68.174,47.981
P02.7: JP_Steer.1 LQ-TC264-SYSVC.96 | length 32.5
  TOP w0.381: JP_Steer.1@43.917,56.388 43.891,56.363 43.891,52.553 52.705,43.739 66.116,43.739 68.072,45.695 LQ-TC264-SYSVC.96
P10.1: JP_Code2.4 LQ-TC264-SYSVC.89 | length 58.5
  TOP w0.381: JP_Code2.4@74.5,-0.4 73.4,0.7 71.1,0.7 69.7,2.1 69.7,5.509 66.192,9.017 66.192,40.411 70.561,44.78 72.644,44.78 75.641,47.777 LQ-TC264-SYSVC.89@75.641,48.209
P10.2: JP_W2UART.1 JP_W2UART.6 | length 6.2
  BOT w0.381: JP_W2UART.6 34.341,7.798 36.83,7.798 37.655,8.623 37.706,8.623 JP_W2UART.1 JP_W2UART.1@38.303,9.271
P10.3: JP_Code2.3 LQ-TC264-SYSVC.88 | length 51.4
  TOP w0.381: JP_Code2.3@74.6,2.1 74.6,2.26 67.259,9.601 67.259,40.259 71.272,44.272 73.99,44.272 LQ-TC264-SYSVC.88@75.26,45.542
P15.0: JP_IPS.6 LQ-TC264-SYSVC.65 | length 44.4
  BOT w0.381: JP_IPS.6@68.529,56.591 68.631,56.49 JP_IPS.6 68.631,51.029 69.393,50.267 69.393,44.399 74.473,39.319 74.473,16.408 73.304,15.24 LQ-TC264-SYSVC.65@73.203,15.24
P15.1: JP_IPS.5 LQ-TC264-SYSVC.64 | length 90.4
  BOT w0.381: JP_IPS.5@71.069,56.591 71.526,56.591 73.508,58.572 75.946,58.572 77.419,57.099 ; LQ-TC264-SYSVC.64@75.59,15.113 75.59,15.392 77.394,17.196 ; 77.394,17.196 77.419,37.134 ; 77.394,17.196 77.419,17.221 77.419,37.134 ; 77.419,37.134 77.419,57.099 ; 77.419,37.134 77.445,57.074 77.419,57.099
P15.2: JP_IPS.7 LQ-TC264-SYSVC.67 | length 41.7
  BOT w0.381: JP_IPS.7@65.989,56.591 66.091,56.49 JP_IPS.7 66.091,50.292 66.726,49.657 66.726,44.425 71.831,39.319 71.831,19.126 72.858,18.099 72.858,17.896 LQ-TC264-SYSVC.67@72.949,17.805
P15.3: JP_IPS.3 LQ-TC264-SYSVC.66 | length 40.5
  BOT w0.381: LQ-TC264-SYSVC.66@75.565,17.805 75.565,17.996 76.098,18.53 76.098,42.266 74.397,43.967 74.397,49.708 76.2,51.511 76.2,56.54 JP_IPS.3@76.149,56.591
P15.4: JP_IPS.8 LQ-TC264-SYSVC.63 | length 57.3
  BOT w0.381: JP_IPS.8@63.449,56.591 63.449,56.134 58.852,51.537 58.852,44.298 60.02,43.129 65.507,43.129 70.891,37.744 70.891,15.418 72.314,13.995 74.422,13.995 LQ-TC264-SYSVC.63@75.743,12.675
P15.5: JP_IPS.4 LQ-TC264-SYSVC.61 | length 69.8
  TOP w0.381: v1(68.529,17.805) 68.699,17.635 68.699,17.381 LQ-TC264-SYSVC.61@73.355,12.725
  BOT w0.381: v1(68.529,17.805) 68.529,20.701 60.63,28.6 60.63,33.757 57.277,37.109 57.277,53.111 63.17,59.004 68.936,59.004 69.875,58.064 69.875,55.601 70.485,54.991 72.39,54.991 73.609,56.21 JP_IPS.4@73.609,56.591
P15.6: JP_W2UART.3 LQ-TC264-SYSVC.62 | length 41.9
  BOT w0.381: JP_W2UART.3 37.16,10.617 39.167,10.617 40.97,8.814 74.574,8.814 75.794,10.033 LQ-TC264-SYSVC.62@75.794,10.058
P15.7: JP_W2UART.5 LQ-TC264-SYSVC.69 | length 47.1
  TOP w0.381: v1@70.053,20.269 73.152,20.269 LQ-TC264-SYSVC.69
  BOT w0.381: JP_W2UART.5@33.274,9.246 33.32,9.292 34.311,9.292 38.938,13.919 47.015,13.919 47.473,14.376 68.732,14.376 69.825,15.469 v1(69.825,20.269)
P20.0: JP_Code1.4 LQ-TC264-SYSVC.48 | length 11.6
  TOP w0.381: JP_Code1.4@60.985,-0.686 62.154,0.483 62.154,3.353 62.941,4.14 LQ-TC264-SYSVC.48@62.941,10.109
P20.3: JP_Code1.3 LQ-TC264-SYSVC.49 | length 11.5
  TOP w0.381: JP_Code1.3 60.909,5.461 61.697,6.248 61.697,11.506 LQ-TC264-SYSVC.49@62.89,12.7
P20.11: JP_20602.3 LQ-TC264-SYSVC.57 | length 21.1
  TOP w0.381: LQ-TC264-SYSVC.57@70.764,9.957 71.907,8.814 76.403,8.814 78.41,10.82 78.41,15.596 79.705,16.891 80.569,16.891 81.331,17.653 81.331,19.279 JP_20602.3
P20.12: JP_20602.5 LQ-TC264-SYSVC.58 | length 12
  BOT w0.381: LQ-TC264-SYSVC.58@70.561,12.649 71.857,11.354 76.505,11.354 79.985,14.834 JP_20602.5@79.985,15.469
P20.13: JP_20602.6 LQ-TC264-SYSVC.59 | length 13.3
  TOP w0.381: LQ-TC264-SYSVC.59@73.101,7.569 77.089,7.569 78.613,9.093 80.747,9.093 81.559,9.906 81.559,11.43 JP_20602.6 JP_20602.6@79.883,13.106
P20.14: JP_20602.4 LQ-TC264-SYSVC.60 | length 12
  TOP w0.381: LQ-TC264-SYSVC.60@73.177,10.211 74.32,11.354 76.454,11.354 77.546,12.446 77.546,15.697 JP_20602.4
P21.2: JP_Motor.5 LQ-TC264-SYSVC.35 | length 15.7
  TOP w0.381: JP_Motor.5@40.792,0.584 45.72,5.512 52.045,5.512 52.781,6.248 LQ-TC264-SYSVC.35@52.781,7.569
P21.3: JP_Motor.4 LQ-TC264-SYSVC.38 | length 16.6
  TOP w0.381: JP_Motor.4@43.155,0.635 47.117,4.597 55.093,4.597 55.321,4.826 LQ-TC264-SYSVC.38@55.321,7.569
P21.4: JP_Motor.3 LQ-TC264-SYSVC.41 | length 16.5
  TOP w0.381: JP_Motor.3@45.999,0.66 46.025,0.686 46.025,1.575 47.676,3.226 55.677,3.226 57.861,5.41 LQ-TC264-SYSVC.41@57.861,7.569
P21.5: JP_Motor.2 LQ-TC264-SYSVC.44 | length 16.1
  TOP w0.381: JP_Motor.2@48.463,0.559 48.463,1.092 49.911,2.54 56.921,2.54 59.233,4.851 59.233,6.401 LQ-TC264-SYSVC.44@60.401,7.569
P22.0: LQ-TC264-SYSVC.28 S4.1 | length 37.5
  TOP w0.381: S4.1@10.312,7.264 12.116,5.461 24.994,5.461 27.33,7.798 39.04,7.798 40.081,8.839 43.739,8.839 45.009,10.109 LQ-TC264-SYSVC.28@45.161,10.109
P22.1: LQ-TC264-SYSVC.31 S6.1 | length 28
  TOP w0.381: S6.1@23.038,7.468 23.089,7.518 23.089,9.474 25.07,11.455 46.507,11.455 LQ-TC264-SYSVC.31@47.701,12.649
P22.2: LQ-TC264-SYSVC.30 S1.1 | length 34
  TOP w0.381: S1.1 21.361,3.759 22.479,4.877 38.532,4.877 41.935,8.28 45.923,8.28 LQ-TC264-SYSVC.30@47.65,10.008
P22.3: LQ-TC264-SYSVC.32 S2.1 | length 30.7
  TOP w0.381: S2.1@22.708,-0.102 25.171,2.362 40.919,2.362 44.882,6.325 48.844,6.325 50.089,7.569 LQ-TC264-SYSVC.32@50.241,7.569
P23.1: LQ-TC264-SYSVC.29 S3.1 | length 40.5
  TOP w0.381: S3.1@10.338,0 10.729,0.392 11.237,0.392 12.217,1.372 21.057,1.372 23.647,3.962 39.421,3.962 42.748,7.29 46.844,7.29 46.88,7.326 47.458,7.326 LQ-TC264-SYSVC.29@47.701,7.569
P32.4: LQ-TC264-SYSVC.24 S7.4 | length 44.8
  TOP w0.381: S7.4@4.293,21.971 9.068,17.196 13.614,17.196 16.891,13.919 43.942,13.919 LQ-TC264-SYSVC.24
P33.10: LQ-TC264-SYSVC.21 S7.2 | length 36.1
  TOP w0.381: S7.2 11.608,19.914 14.529,19.914 18.567,15.875 40.843,15.875 LQ-TC264-SYSVC.21@42.393,17.424
P33.11: LQ-TC264-SYSVC.22 S7.1 | length 36.8
  TOP w0.381: S7.1@12.116,22.098 14.757,22.098 19.837,17.018 38.329,17.018 40.589,19.279 43.713,19.279 LQ-TC264-SYSVC.22
P33.12: LQ-TC264-SYSVC.27 S5.1 | length 30.8
  TOP w0.381: S5.1@16.688,10.693 21.387,5.994 24.003,5.994 26.327,8.319 26.327,9.614 27.356,10.643 40.31,10.643 40.843,10.109 LQ-TC264-SYSVC.27@42.621,10.109
P33.13: LQ-TC264-SYSVC.23 S7.3 | length 38.8
  TOP w0.381: S7.3@6.706,21.793 6.831,21.793 7.317,21.307 7.317,21.182 10.033,18.466 13.792,18.466 17.069,15.189 18.745,15.189 18.771,15.215 LQ-TC264-SYSVC.23
VCC3V3: C33.1 C34.1 JP_20602.2 JP_Code1.2 JP_Code2.2 JP_IPS.2 R31.1 U3.5 | length 4.5
  TOP w0.254: v1(68.986,27.254) 70.383,27.254 71.12,27.991 R31.1 R31.1@73.152,27.991
  other v1: 57.455,22.352 59.69,22.352 61.976,22.403 61.976,24.181 57.455,24.282 59.69,24.308
VCC5V: C13.1 C14.1 C31.1 C32.1 C41.1 C42.1 C51.1 C52.1 JP_GP2Y.1 JP_Motor.6 JP_W2UART.9 R11.1 U1.3 U3.1 U3.3 U4.1 U4.3 U5.1 U5.3 U6.1 | length 4.2
  TOP w0.254: v1(68.961,29.896) 73.101,29.896 R11.1@73.152,29.845
  other v1: 27.33,41.605
VCCBAT: *.2 C01.1 C02.1 C11.1 C12.1 C21.1 C22.1 KEY_7V2.2 KEY_7V2.3 R01.2 R21.2 R22.2 U1.1 U2.4
  other v1: 10.49,28.016
VCCCAM: C43.1 C44.1 JP_Camera.17 JP_Camera.18 R41.1 U4.5 | length 4.7
  TOP w0.254: v1(69.012,34.671) 69.015,34.667 70.158,34.667 71.222,33.604 R41.1 73.152,33.604 R41.1@73.203,33.553
  other v1: 44.501,41.808 44.526,44.069
VCCMCU: C53.1 C54.1 LQ-TC264-SYSVC.46 R51.1 U5.5 | length 4.8
  TOP w0.254: v1(68.986,24.689) 70.282,24.689 71.628,26.035 73.05,26.035 R51.1@73.152,26.137
  other v1: 46.406,23.851 41.783,23.952
VCCSteer: C23.1 C24.1 JP_Steer.2 L21.2 R24.1 R25.1 | length 4.5
  TOP w0.254: v1(68.961,32.309) 71.12,32.309 71.704,31.725 R25.1@73.254,31.725
  other v1: 16.764,53.137
pads on no net: JP_20602.7 JP_20602.8 JP_Camera.5 JP_Code1.5 JP_Code1.6 JP_Code2.5 JP_Code2.6 JP_W2UART.2 JP_W2UART.4 JP_W2UART.10 LQ-TC264-SYSVC.25 LQ-TC264-SYSVC.26 LQ-TC264-SYSVC.33 LQ-TC264-SYSVC.34 LQ-TC264-SYSVC.36 LQ-TC264-SYSVC.37 LQ-TC264-SYSVC.39 LQ-TC264-SYSVC.42 LQ-TC264-SYSVC.45 U3.4 U4.4 U5.4

## Polygon pours and split planes (outlines as drawn)
no net on Top Overlay "NONET_L-01_P-001" (solid, remove dead copper): 47.701,35.89
GND on BOT "GND_L04_P085" (solid, remove dead copper, pour order 85): 21.59,34.595 21.59,31.064 21.565,31.039 21.412,31.191 17.247,31.191 17.247,32.664 19.456,34.874 19.456,35.331
GND on BOT "GND_L04_P057" (solid, remove dead copper, pour order 57): 25.298,34.646 25.197,34.544 19.406,34.544 19.406,46.584 18.618,47.371 15.342,47.371 15.342,51.587 15.545,51.791 18.009,51.791 18.009,48.87 17.983,48.844 18.034,48.793 19.964,48.793 19.964,48.666 20.879,47.752 20.879,41.656 25.121,41.656 25.171,41.605 25.298,41.605
no net on BOT "NONET_L04_P055" (solid, remove dead copper, pour order 55): 17.958,49.327
no net on BOT "NONET_L04_P047" (solid, remove dead copper, pour order 47): 16.129,53.111
GND on BOT "GND_L04_P020" (solid, remove dead copper, pour order 20): 13.335,31.293 13.335,29.21 15.062,29.21 15.088,29.235 15.088,23.368 22.2,23.368 22.2,26.238 20.32,26.238 20.269,26.289 20.269,24.333 18.923,24.333 18.618,24.638 18.618,27.432 14.757,31.293
VCCBAT on BOT "VCCBAT_L04_P002" (solid, remove dead copper, pour order 2): 14.173,29.032 13.792,29.032 13.157,29.032 13.157,29.667 13.157,33.604 9.728,33.604 9.728,26.619 14.173,26.619
VCCSteer on TOP "VCCSTEER_L01_P033" (solid, remove dead copper, pour order 33): 12.852,50.14 14.275,50.14 14.275,52.553 16.866,55.143 17.856,55.143 17.856,51.587 15.392,51.587 15.392,49.251 12.852,49.251 12.852,46.863 11.506,46.863 11.455,46.914 11.455,52.07 12.852,52.046
NetQ1_1 on TOP "NETQ1_1_L01_P111" (solid, remove dead copper, pour order 111): 63.449,36.576 63.449,40.437 63.373,40.513 61.468,40.513 61.468,36.601 61.493,36.576
NetQ1_2 on TOP "NETQ1_2_L01_P109" (solid, remove dead copper, pour order 109): 61.595,36.347 61.519,36.271 61.519,28.55 63.551,28.55 63.525,28.575 63.525,36.398
VCC3V3 on TOP "VCC3V3_L01_P107" (solid, remove dead copper, pour order 107): 63.144,18.466 56.21,18.466 56.21,25.552 63.12,25.552
GND on TOP "GND_L01_P103" (solid, remove dead copper, pour order 103): 63.729,37.186 63.729,17.831 63.703,17.805 63.729,17.78 65.71,17.78 65.71,37.213
VCC5V on TOP "VCC5V_L01_P101" (solid, remove dead copper, pour order 101): 53.213,16.434 53.365,16.281 55.778,16.281 55.956,16.459 55.956,27.33 57.125,28.499 57.125,31.623 48.768,31.623 48.768,18.313 54.762,18.313 54.762,17.145 53.391,17.145 53.213,16.967
GND on TOP "GND_L01_P099" (solid, remove dead copper, pour order 99): 52.832,16.612 53.416,16.027 57.633,16.027 57.633,18.11 57.709,18.186 65.71,18.186 65.71,17.882 65.71,0.711 62.586,0.711 62.459,0.838 62.459,3.15 64.211,4.902 64.211,13.995 49.124,13.995 48.946,14.173 48.946,18.186 52.832,18.186
GND on TOP "GND_L01_P097" (solid, remove dead copper, pour order 97): 54.61,18.186 54.61,17.247 53.238,17.247 51.435,15.443 49.124,15.443 49.124,18.161 49.149,18.186
GNDMCU on TOP "GNDMCU_L01_P095" (solid, remove dead copper, pour order 95): 31.572,17.704 31.598,17.729 31.598,20.041 32.537,20.041 33.731,21.234 33.731,22.352 47.447,22.352 47.523,22.276 47.523,19.71 36.17,19.71 34.163,17.704
VCCMCU on TOP "VCCMCU_L01_P093" (solid, remove dead copper, pour order 93): 32.055,22.479 47.625,22.479 47.676,22.53 47.6,22.606 47.6,25.324 33.503,25.324 32.029,23.851
no net on TOP "NONET_L01_P091" (solid, remove dead copper, pour order 91): 70.333,25.984
VCCCAM on TOP "VCCCAM_L01_P089" (solid, remove dead copper, pour order 89): 33.63,51.079 33.63,46.126 33.452,45.949 31.445,45.949 31.445,44.45 30.353,44.45 30.353,45.949 28.321,45.949 28.321,44.044 28.55,43.815 33.071,43.815 37.617,48.362 37.617,51.384
no net on TOP "NONET_L01_P087" (solid, remove dead copper, pour order 87): 33.63,50.648
NetKEY_7V2_1 on TOP "NETKEY_7V2_1_L01_P083" (solid, remove dead copper, pour order 83): 9.576,49.2 9.652,49.124 9.652,42.697 6.121,42.697 6.02,42.596 6.02,36.043 2.159,36.043 2.108,35.992 1.93,36.17 1.905,49.124 1.905,49.149
VCCCAM on TOP "VCCCAM_L01_P081" (solid, remove dead copper, pour order 81): 42.926,45.847 46.33,45.847 46.482,45.695 46.482,40.386 42.951,40.386 42.926,40.411 42.926,40.386 37.236,40.386 36.957,40.64 36.957,44.526 36.932,44.552 37.059,44.679 40.513,44.679 40.513,50.546 40.538,50.571 40.386,50.724 33.604,50.724 33.604,61.189 33.63,61.214 33.68,61.163 45.949,61.163 45.949,55.575 46.203,55.321 48.819,55.321 48.819,56.794 48.92,56.794 49.86,56.794 49.86,52.527 49.759,52.629 45.009,52.629 45.009,58.166 37.16,58.166 37.16,55.118 37.44,54.839 42.926,54.839
VCCSteer on TOP "VCCSTEER_L01_P079" (solid, remove dead copper, pour order 79): 22.403,55.448 24.867,55.448 26.975,53.34 32.868,53.34 32.868,61.011 32.918,61.062 22.403,61.062
GNDSteer on TOP "GNDSTEER_L01_P077" (solid, remove dead copper, pour order 77): 22.123,58.064 22.098,58.039 22.098,55.296 24.562,55.296 26.619,53.238 26.619,49.733 21.869,49.733 21.285,50.317 21.285,53.111 20.803,53.594 18.161,53.594 18.161,55.499 18.136,55.524
NetD21_2 on TOP "NETD21_2_L01_P073" (solid, remove dead copper, pour order 73): 21.107,49.987 21.565,49.53 26.721,49.53 26.797,49.454 26.873,49.53 26.873,53.086 32.995,53.086 33.02,53.111 33.02,46.253 21.387,46.253 21.006,46.634 21.006,47.828 19.71,49.124 18.111,49.124 18.136,53.162 20.853,53.162 21.107,52.908
no net on TOP "NONET_L01_P071" (solid, remove dead copper, pour order 71): 59.182,11.379
VCC5V on TOP "VCC5V_L01_P069" (solid, remove dead copper, pour order 69): 41.097,29.896 41.097,28.346 40.107,28.346 38.583,26.822 38.329,26.822 25.933,26.822 24.689,25.578 24.689,22.784 30.937,22.784 30.937,21.819 29.134,21.819 29.134,20.32 29.159,20.295 31.801,20.295 31.801,23.876 33.604,25.578 33.858,25.578 40.919,25.578 41.986,26.645 41.986,32.207 41.808,32.385 32.309,32.385 32.309,28.829 33.02,28.118 34.188,28.118 35.712,29.642 38.735,29.642 38.989,29.896
no net on TOP "NONET_L01_P067" (solid, remove dead copper, pour order 67): 32.436,32.182
GND on TOP "GND_L01_P065" (solid, remove dead copper, pour order 65): 38.633,27.153 40.056,28.55 40.488,28.55 40.589,28.651 40.589,29.693 39.014,29.693 38.608,29.286
GND on TOP "GND_L01_P063" (solid, remove dead copper, pour order 63): 34.442,27.991 32.881,27.991 32.207,28.642 32.207,31.09 29.87,31.09 29.82,31.039 29.82,27.127 38.684,27.101 38.684,29.286 35.738,29.286
GND on TOP "GND_L01_P061" (solid, remove dead copper, pour order 61): 14.783,28.473 15.824,29.515 25.171,29.515 25.222,29.464 25.222,26.433 24.435,25.705 24.435,22.606 30.734,22.606 30.734,21.895 29.032,21.895 29.032,20.193 31.293,20.193 31.394,20.091 31.394,17.704 22.022,17.704 14.783,24.943
GND on TOP "GND_L01_P059" (solid, remove dead copper, pour order 59): 15.494,47.65 15.773,47.371 19.279,47.371 19.279,48.971 19.177,49.073 17.907,49.073 17.907,51.537 17.856,51.486 15.494,51.486
GND on TOP "GND_L01_P053" (solid, remove dead copper, pour order 53): 13.005,53.67 9.449,53.67 9.449,49.682 3.175,49.682 3.073,49.581 3.073,60.96 13.005,60.96
GNDSteer on TOP "GNDSTEER_L01_P035" (solid, remove dead copper, pour order 35): 12.954,45.999 12.954,44.018 12.878,43.942 10.033,43.942 10.033,52.883 10.389,53.238 13.183,53.238 13.183,61.011 22.149,61.011 22.149,55.524 22.149,55.27 22.047,55.27 16.789,55.27 14.097,52.578 14.097,50.343 13.056,50.343 12.954,50.444 12.954,52.426 11.354,52.426 11.227,52.299 11.227,46.685 11.913,45.999
NetR23_1 on TOP "NETR23_1_L01_P031" (solid, remove dead copper, pour order 31): 14.834,46.126 14.834,49.047 13.183,49.047 13.208,49.022 13.208,44.094 16.408,44.094 16.434,44.12 16.434,46.126
NetR21_1 on TOP "NETR21_1_L01_P029" (solid, remove dead copper, pour order 29): 17.781,44.348 16.053,42.621 16.053,40.97 17.78,40.97 17.78,39.726 16.205,39.726 15.418,40.513 15.418,42.824 16.942,44.348 16.942,46.076 17.781,46.076
no net on TOP "NONET_L01_P028" (solid, remove dead copper, pour order 28): 17.805,39.751
NetR22_1 on TOP "NETR22_1_L01_P026" (solid, remove dead copper, pour order 26): 18.974,46.179 18.974,43.246 17.755,42.675 17.755,41.25 16.332,41.25 16.332,42.647 18.085,44.399 18.085,46.203
VCCBAT on TOP "VCCBAT_L01_P010" (solid, remove dead copper, pour order 10): 20.955,46.279 21.26,45.974 21.285,45.974 21.285,38.405 19.177,38.405 19.126,38.456 19.075,38.405 19.075,34.214 29.54,34.214 29.54,28.143 25.629,28.143 25.502,28.27 25.502,29.769 15.113,29.769 14.503,29.159 14.503,26.314 9.347,26.314 6.604,29.058 2.134,29.058 2.134,35.862 6.401,35.89 6.35,35.941 6.35,42.418 13.233,42.418 16.104,39.548 17.932,39.548 17.932,42.647 19.126,43.205 19.126,46.355 19.202,46.279
GNDCAM on TOP "GNDCAM_L01_P018" (solid, remove dead copper, pour order 18): 36.703,37.821 34.442,37.821 34.417,37.795 34.341,37.871 34.341,42.342 34.341,44.552 37.821,48.031 37.821,50.038 39.903,50.038 39.954,50.089 40.005,50.038 40.005,45.034 39.751,44.78 36.751,44.78
VCC5V on TOP "VCC5V_L01_P016" (solid, remove dead copper, pour order 16): 29.718,36.881 29.718,41.123 29.464,41.377 29.464,43.053 30.378,43.053 30.378,41.707 30.556,41.529 31.445,41.529 31.445,43.536 31.242,43.739 26.187,43.739 26.187,36.91
GND on TOP "GND_L01_P014" (solid, remove dead copper, pour order 14): 36.932,37.592 36.932,40.259 36.957,40.284 38.837,40.284 38.837,37.592
GND on TOP "GND_L01_P012" (solid, remove dead copper, pour order 12): 29.566,42.901 30.277,42.901 30.277,41.021 34.112,41.021 34.112,37.612 38.837,37.612 38.837,34.544 19.406,34.544 19.406,36.728 19.99,37.313 21.615,37.313 21.615,41.681 25.705,41.681 25.73,41.707 25.781,41.656 25.781,36.728 25.857,36.652 29.845,36.652 29.845,41.351 29.566,41.631
no net on TOP "NONET_L01_P008" (solid, remove dead copper, pour order 8): 29.718,28.194
GNDCAM on TOP "GNDCAM_L01_P004" (solid, remove dead copper, pour order 4): 46.304,55.702 46.304,60.655 46.431,60.782 60.782,60.782 60.782,55.829 58.115,55.829 58.115,57.099 48.717,57.099 48.717,55.829 48.59,55.702
no net on Mechanical 15 "NONET_L-01_P-001" (solid, remove dead copper): 37.262,40.818
VCC3V3 on POW02 (split plane): 0.5,63.117 42.39,63.117 42.39,59.819 22.71,59.819 22.418,60.112 22.376,60.14 22.327,60.15 22.277,60.14 22.235,60.112 22.207,60.07 22.197,60.02 22.197,54.562 11.227,54.562 11.177,54.552 11.135,54.524 11.11,54.498 11.082,54.456 11.072,54.407 11.072,46.685 11.082,46.636 11.11,46.594 11.152,46.566 11.201,46.556 24.813,46.556 26.058,45.311 26.058,32.156 26.068,32.107 26.096,32.065 26.274,31.887 26.316,31.859 26.365,31.849 32.002,31.849 32.002,26.545 24.46,26.545 24.411,26.536 24.369,26.508 24.292,26.431 24.264,26.389 24.255,26.34 24.255,-0.813 24.264,-0.862 24.292,-0.904 25.766,-2.378 25.808,-2.406 25.857,-2.415 54.836,-2.415 54.836,-3.117 0.5,-3.117 0.483,-3.119 0.242,-3.11 -0.015,-3.082 -0.269,-3.036 -0.52,-2.973 -0.765,-2.891 -1.003,-2.792 -1.234,-2.676 -1.457,-2.545 -1.669,-2.397 -1.87,-2.235 -2.059,-2.059 -2.235,-1.87 -2.397,-1.669 -2.545,-1.457 -2.676,-1.234 -2.792,-1.003 -2.891,-0.765 -2.973,-0.52 -3.036,-0.269 -3.082,-0.015 -3.11,0.242 -3.119,0.483 -3.117,0.5 -3.117,59.5 -3.119,59.517 -3.11,59.758 -3.082,60.015 -3.036,60.269 -2.973,60.52 -2.891,60.765 -2.792,61.003 -2.676,61.234 -2.545,61.457 -2.397,61.669 -2.235,61.87 -2.059,62.059 -1.87,62.235 -1.669,62.397 -1.457,62.545 -1.234,62.676 -1.003,62.792 -0.765,62.891 -0.52,62.973 -0.269,63.036 -0.015,63.082 0.242,63.11 0.483,63.119
VCCSteer on POW02 (split plane): 22.565,59.598 22.607,59.57 22.657,59.561 42.39,59.561 42.39,37.109 42.4,37.06 42.428,37.018 45.908,33.538 45.95,33.51 45.999,33.5 69.873,33.5 69.949,33.424 69.949,31.143 64.925,31.143 64.925,32.283 64.922,32.296 64.925,32.309 64.915,32.358 64.887,32.4 64.845,32.428 64.795,32.438 39.297,32.438 24.958,46.777 24.916,46.805 24.867,46.815 11.331,46.815 11.331,54.303 22.327,54.303 22.376,54.313 22.418,54.341 22.446,54.383 22.456,54.432 22.451,54.458 22.456,54.483 22.456,59.708
VCC5V on POW02 (split plane): 39.304,32.065 39.346,32.037 39.395,32.027 39.445,32.037 39.487,32.065 39.515,32.107 39.525,32.156 39.52,32.179 64.666,32.179 64.666,31.09 64.673,31.051 64.666,31.013 64.676,30.964 64.704,30.922 64.746,30.894 64.795,30.884 69.949,30.884 69.949,28.908 64.767,28.908 64.743,28.923 64.694,28.933 64.644,28.923 64.602,28.895 64.574,28.853 64.564,28.804 64.564,25.682 40.767,25.682 40.717,25.672 40.675,25.644 40.647,25.602 40.638,25.552 40.638,5.486 40.647,5.437 40.675,5.395 41.107,4.963 41.149,4.935 41.199,4.925 54.836,4.925 54.836,-2.157 25.911,-2.157 24.513,-0.759 24.513,26.286 24.514,26.287 32.131,26.287 32.181,26.296 32.223,26.324 32.251,26.366 32.26,26.416 32.26,32.004 32.251,32.054 32.223,32.096 32.181,32.124 32.131,32.133 32.081,32.124 32.058,32.108 26.419,32.108 26.317,32.21 26.317,45.052
VCC3V3 on POW02 (split plane): 80.758,63.11 81.015,63.082 81.269,63.036 81.52,62.973 81.765,62.891 82.003,62.792 82.234,62.676 82.457,62.545 82.669,62.397 82.87,62.235 83.059,62.059 83.235,61.87 83.397,61.669 83.545,61.457 83.676,61.234 83.792,61.003 83.891,60.765 83.973,60.52 84.036,60.269 84.082,60.015 84.11,59.758 84.119,59.517 84.117,59.501 84.117,59.5 84.085,59.5 84.086,59.497 84.117,59.498 84.117,0.502 84.086,0.503 84.085,0.5 84.117,0.5 84.117,0.499 84.119,0.483 84.11,0.242 84.082,-0.015 84.036,-0.269 83.973,-0.52 83.891,-0.765 83.792,-1.003 83.676,-1.234 83.545,-1.457 83.397,-1.669 83.235,-1.87 83.059,-2.059 82.87,-2.235 82.669,-2.397 82.457,-2.545 82.234,-2.676 82.003,-2.792 81.765,-2.891 81.52,-2.973 81.269,-3.036 81.015,-3.082 80.758,-3.11 80.517,-3.119 80.5,-3.117 55.095,-3.117 55.095,-2.184 55.095,5.029 55.085,5.079 55.057,5.121 55.032,5.146 54.99,5.174 54.94,5.184 41.252,5.184 40.896,5.54 40.896,8.811 66.954,8.811 67.004,8.821 67.046,8.849 67.074,8.891 67.077,8.906 69.484,11.313 69.512,11.355 69.522,11.405 69.522,13.713 69.751,13.942 70.917,13.942 70.966,13.952 71.008,13.98 71.135,14.107 71.163,14.149 71.173,14.199 71.173,25.451 71.163,25.5 71.135,25.542 70.831,25.847 70.789,25.875 70.739,25.885 67.285,25.885 67.235,25.875 67.193,25.847 66.939,25.593 66.911,25.551 66.901,25.502 66.901,14.709 66.698,14.506 47.754,14.506 47.754,25.423 64.694,25.423 64.743,25.433 64.785,25.461 64.813,25.503 64.823,25.552 64.823,28.649 70.053,28.649 70.103,28.659 70.145,28.687 70.17,28.712 70.198,28.754 70.208,28.804 70.208,30.941 70.224,30.964 70.233,31.013 70.224,31.063 70.208,31.086 70.208,33.301 70.221,33.309 70.249,33.351 70.259,33.401 70.259,35.966 70.249,36.016 70.221,36.058 70.17,36.109 70.128,36.137 70.079,36.147 52.327,36.147 46.586,41.887 46.586,45.822 46.576,45.871 46.548,45.913 46.497,45.964 46.455,45.992 46.406,46.002 42.649,46.002 42.649,59.617 42.665,59.64 42.674,59.69 42.665,59.74 42.649,59.763 42.649,63.117 80.5,63.117 80.517,63.119
VCCCAM on POW02 (split plane): 46.327,41.834 46.337,41.784 46.365,41.742 52.182,35.926 52.224,35.898 52.273,35.888 70,35.888 70,33.733 69.976,33.749 69.926,33.759 46.053,33.759 42.649,37.163 42.649,45.743 46.327,45.743
VCCMCU on POW02 (split plane): 70.914,25.397 70.914,14.252 70.863,14.201 69.698,14.201 69.648,14.191 69.606,14.163 69.301,13.858 69.273,13.816 69.263,13.767 69.263,11.458 66.888,9.083 66.88,9.07 40.922,9.07 40.896,9.096 40.896,25.423 47.496,25.423 47.496,14.402 47.505,14.352 47.533,14.31 47.559,14.285 47.601,14.257 47.65,14.247 66.751,14.247 66.801,14.257 66.843,14.285 67.122,14.564 67.15,14.606 67.16,14.656 67.16,25.448 67.338,25.626 70.685,25.626
GND on GND03 (split plane): 80.758,63.11 81.015,63.082 81.269,63.036 81.52,62.973 81.765,62.891 82.003,62.792 82.234,62.676 82.457,62.545 82.669,62.397 82.87,62.235 83.059,62.059 83.235,61.87 83.397,61.669 83.545,61.457 83.676,61.234 83.792,61.003 83.891,60.765 83.973,60.52 84.036,60.269 84.082,60.015 84.11,59.758 84.119,59.517 84.117,59.501 84.117,59.5 84.085,59.5 84.086,59.497 84.117,59.498 84.117,0.502 84.086,0.503 84.085,0.5 84.117,0.5 84.117,0.499 84.119,0.483 84.11,0.242 84.082,-0.015 84.036,-0.269 83.973,-0.52 83.891,-0.765 83.792,-1.003 83.676,-1.234 83.545,-1.457 83.397,-1.669 83.235,-1.87 83.059,-2.059 82.87,-2.235 82.669,-2.397 82.457,-2.545 82.234,-2.676 82.003,-2.792 81.765,-2.891 81.52,-2.973 81.269,-3.036 81.015,-3.082 80.758,-3.11 80.517,-3.119 80.5,-3.117 0.5,-3.117 0.483,-3.119 0.242,-3.11 -0.015,-3.082 -0.269,-3.036 -0.52,-2.973 -0.765,-2.891 -1.003,-2.792 -1.234,-2.676 -1.457,-2.545 -1.669,-2.397 -1.87,-2.235 -2.059,-2.059 -2.235,-1.87 -2.397,-1.669 -2.545,-1.457 -2.676,-1.234 -2.792,-1.003 -2.891,-0.765 -2.973,-0.52 -3.036,-0.269 -3.082,-0.015 -3.11,0.242 -3.119,0.483 -3.117,0.5 -3.117,59.5 -3.119,59.517 -3.11,59.758 -3.082,60.015 -3.036,60.269 -2.973,60.52 -2.891,60.765 -2.792,61.003 -2.676,61.234 -2.545,61.457 -2.397,61.669 -2.235,61.87 -2.059,62.059 -1.87,62.235 -1.669,62.397 -1.457,62.545 -1.234,62.676 -1.003,62.792 -0.765,62.891 -0.52,62.973 -0.269,63.036 -0.015,63.082 0.242,63.11 0.483,63.119 0.5,63.117 80.5,63.117 80.517,63.119
GNDSteer on GND03 (split plane): 46.124,55.121 46.098,55.095 37.617,55.095 37.568,55.085 37.526,55.057 36.992,54.524 36.964,54.482 36.955,54.432 36.955,46.637 36.624,46.307 25.121,46.307 25.071,46.297 25.029,46.269 25.001,46.227 24.991,46.177 24.991,43.69 14.582,43.69 10.569,47.704 10.569,61.364 46.124,61.364
GNDMCU on GND03 (split plane): 76.782,51.991 76.782,6.48 76.68,6.378 41.608,6.378 41.404,6.581 41.404,34.366 41.404,52.144 61.37,52.144 61.393,52.128 61.443,52.118 61.492,52.128 61.515,52.144 76.629,52.144
GNDCAM on GND03 (split plane): 61.313,53.213 61.313,52.403 41.275,52.403 41.225,52.393 41.183,52.365 41.155,52.323 41.146,52.273 41.146,34.496 25.25,34.496 25.25,46.048 36.678,46.048 36.727,46.058 36.769,46.086 37.176,46.492 37.204,46.534 37.213,46.584 37.213,54.379 37.671,54.836 46.152,54.836 46.201,54.846 46.243,54.874 46.345,54.976 46.373,55.018 46.383,55.067 46.383,61.364 46.637,61.618 61.313,61.618

## Keep-outs
Keep-Out Layer:
  lines w0.254: -3.5,0.5 ccw(c0.5,0.5) 0.5,-3.5 80.5,-3.5 ccw(c80.5,0.5) 84.5,0.5 84.5,59.5 ccw(c80.5,59.5) 80.5,63.5 0.5,63.5 ccw(c0.5,59.5) -3.5,59.5 -3.5,0.5

## Other copper
TOP:
  text "合肥工业大学" at 49.428,39.726 h1.52
  text "OnTheWay" at 50.038,38.354 h1.52
  text "十七届四轮摄像头" at 48.006,36.83 h1.52
  text "2021.12.13" at 50.063,35.509 h1.52
POW02 (plane layer: these items are gaps in the copper):
  lines w0.254: 22.327,54.432 11.227,54.432 11.201,54.407 11.201,46.685 24.867,46.685 39.395,32.156 ; 22.327,54.483 22.327,60.02 22.657,59.69 42.545,59.69 ; 26.187,45.314 26.187,32.156 26.365,31.979 32.106,31.979 ; 32.131,32.004 32.131,26.416 24.46,26.416 24.384,26.34 24.384,-0.813 25.857,-2.286 54.94,-2.286 54.966,-2.311 54.966,5.029 54.94,5.055 41.199,5.055 40.767,5.486 40.767,25.552 64.694,25.552 64.694,28.804 ; 39.294,32.309 64.795,32.309 64.77,32.283 ; 40.792,9.017 40.869,8.941 66.954,8.941 ; 42.52,59.715 42.52,63.678 ; 42.52,59.741 42.52,37.109 45.999,33.63 69.926,33.63 70.079,33.477 70.079,30.963 ; 42.545,45.872 46.406,45.872 46.457,45.822 46.457,41.834 52.273,36.017 70.079,36.017 70.129,35.966 70.129,33.401 ; 47.625,25.552 47.625,14.402 47.65,14.376 66.751,14.376 67.031,14.656 67.031,25.502 67.285,25.756 70.739,25.756 71.044,25.451 71.044,14.199 70.917,14.072 69.698,14.072 69.393,13.767 69.393,11.405 66.98,8.992 ; 54.966,-3.454 54.966,-2.184 ; 64.745,28.778 70.053,28.778 70.079,28.804 70.079,30.988 70.104,31.013 64.795,31.013 ; 64.795,31.09 64.795,32.283
GND03 (plane layer: these items are gaps in the copper):
  lines w0.254: 24.994,43.561 14.529,43.561 10.439,47.65 10.439,61.443 10.49,61.493 46.228,61.493 ; 39.751,34.366 41.25,34.366 ; 39.776,34.366 25.121,34.366 25.121,46.177 36.678,46.177 37.084,46.584 37.084,54.432 37.617,54.966 46.152,54.966 46.253,55.067 46.253,61.417 46.584,61.747 61.443,61.747 61.443,52.273 41.275,52.273 41.275,34.366 41.275,6.528 41.554,6.248 76.733,6.248 76.911,6.426 76.911,52.045 76.683,52.273 61.468,52.273 ; 61.443,52.248 61.443,53.213

## Silkscreen, mask and mechanical layers (free items; w line width, h text height)
Top Overlay:
  lines w0.152: 54.321,-1.956 67.402,-1.956 67.402,5.156 54.321,5.156 54.321,-1.956 ; 68.021,-1.956 81.102,-1.956 81.102,5.156 68.021,5.156 68.021,-1.956
  lines w0.254: 60.02,3.378 60.02,4.267 60.274,4.521 61.544,4.521 61.798,4.267 61.798,3.378 ; 73.72,3.378 73.72,4.267 73.974,4.521 75.244,4.521 75.498,4.267 75.498,3.378
Mechanical 1:
  lines w0.254: -3.5,0.5 ccw(c0.5,0.5) 0.5,-3.5 80.5,-3.5 ccw(c80.5,0.5) 84.5,0.5 84.5,59.5 ccw(c80.5,59.5) 80.5,63.5 0.5,63.5 ccw(c0.5,59.5) -3.5,59.5 -3.5,0.5

## Dimensions
0.5,-3.5 to 0.5,63.5 on Mechanical 1
-3.5,0.5 to 84.5,0.5 on Mechanical 1
0,0 to 0,60 on Mechanical 1
0,0 to 81,0.068 on Mechanical 1

## Text inside footprints (layer, text, board x,y; h text height)
S7: Top Overlay "ON" at 11.76,16.459 h0.64 r180
U6: Top Overlay "+" at 54.881,30.856 h0.64 r45